# Altium PCB ECE453-BrushedDCMotor.PcbDoc
Units mm, origin at the board's own origin, x right, y up, seen from the top; angles counter-clockwise.
Board outline 100 x 100 mm, 2 copper layers (Top Layer, Bottom Layer); 4 components, 6 nets, 4 pads, 0 vias.
Unrouted connection lines stored in the file: 41.
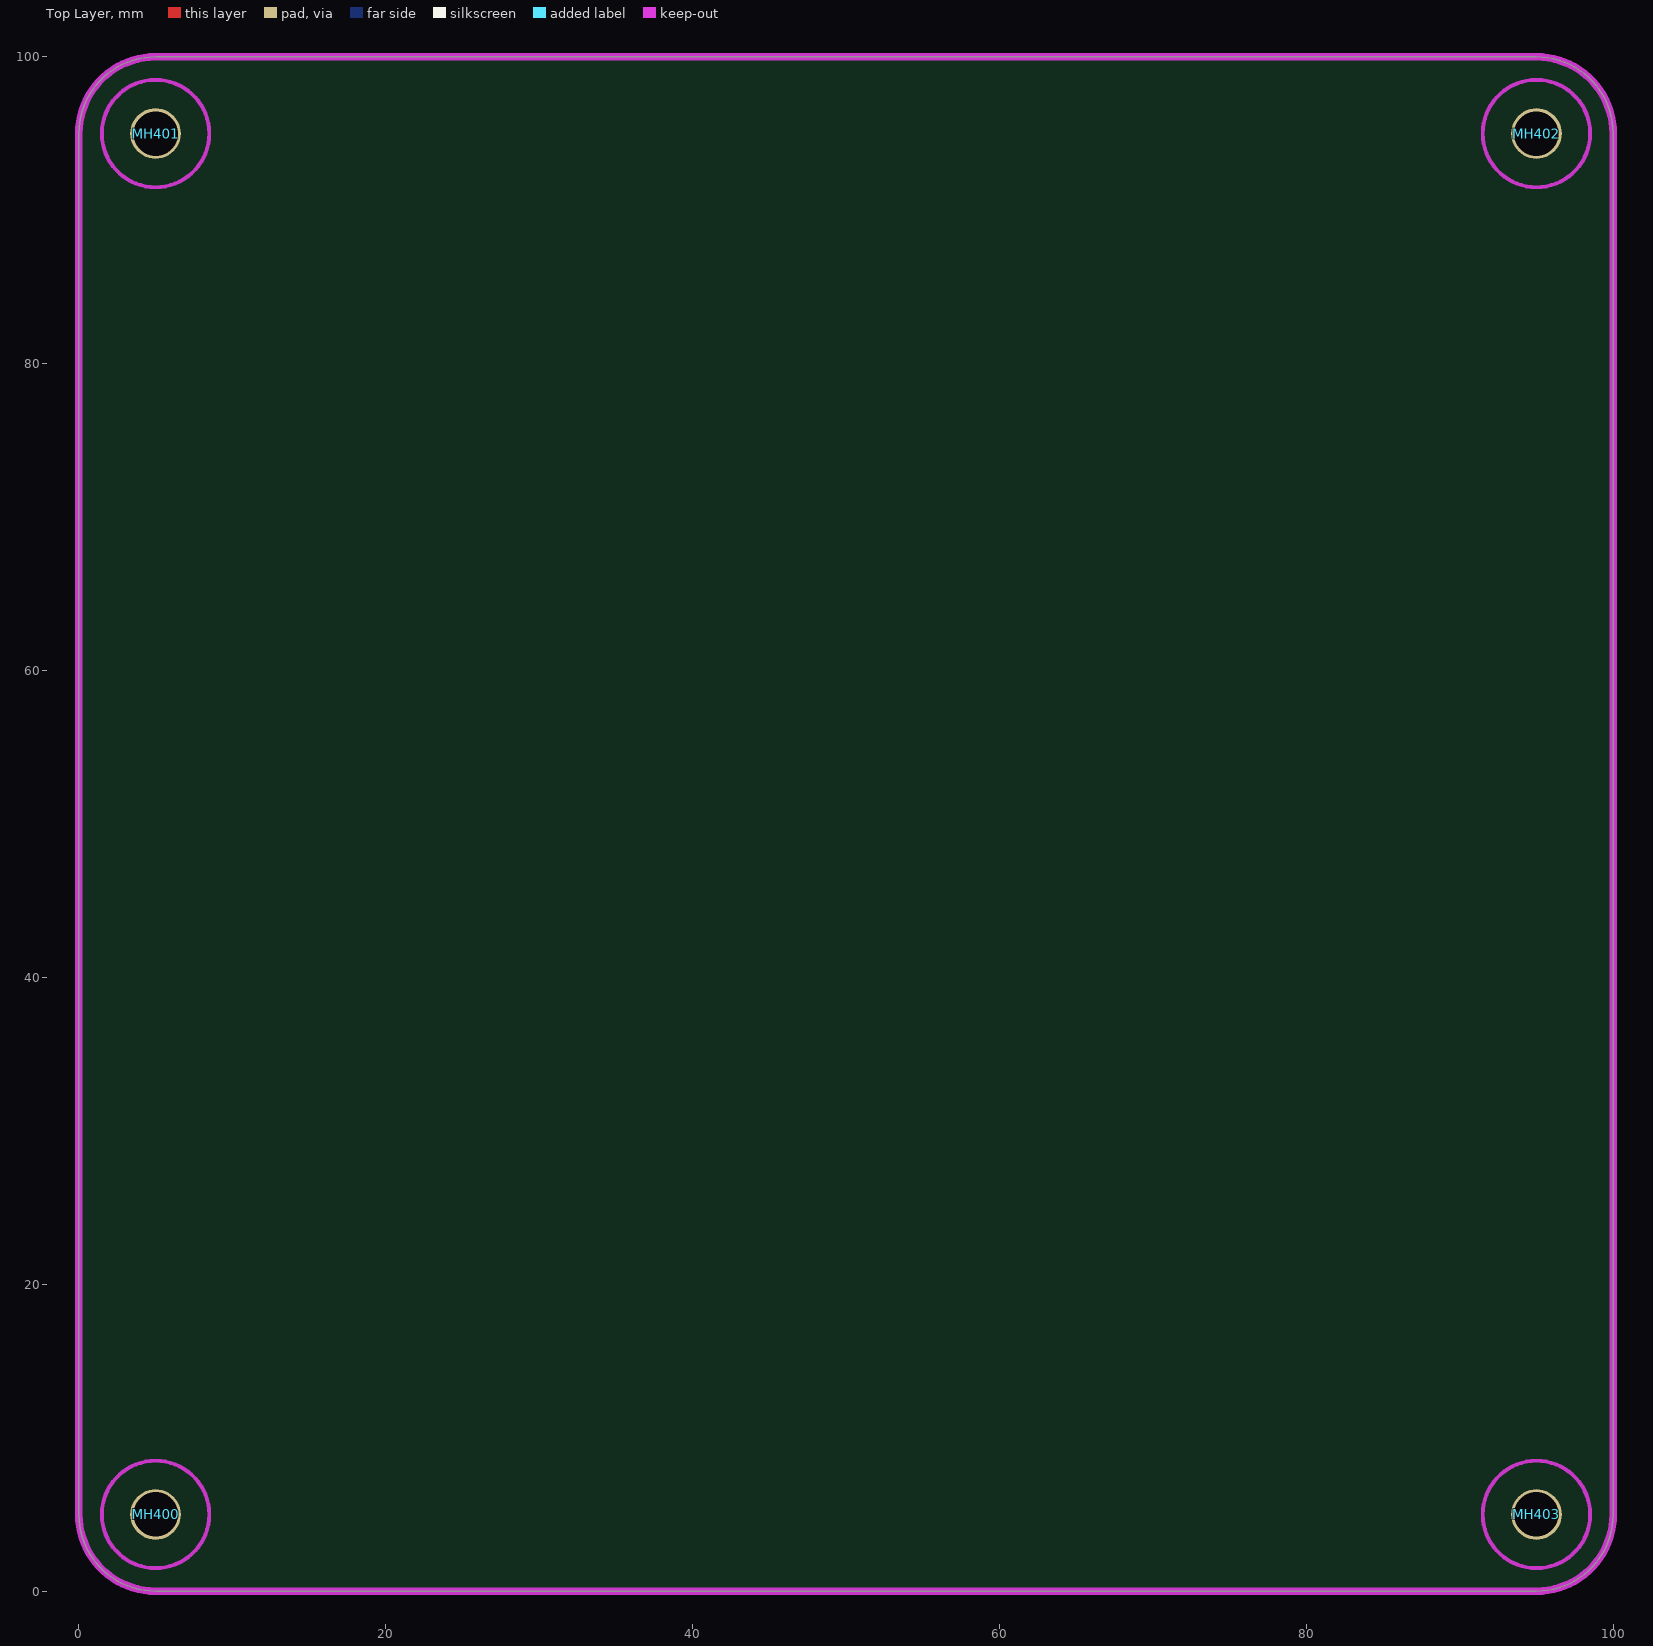
[diagram p0: Top Layer view]
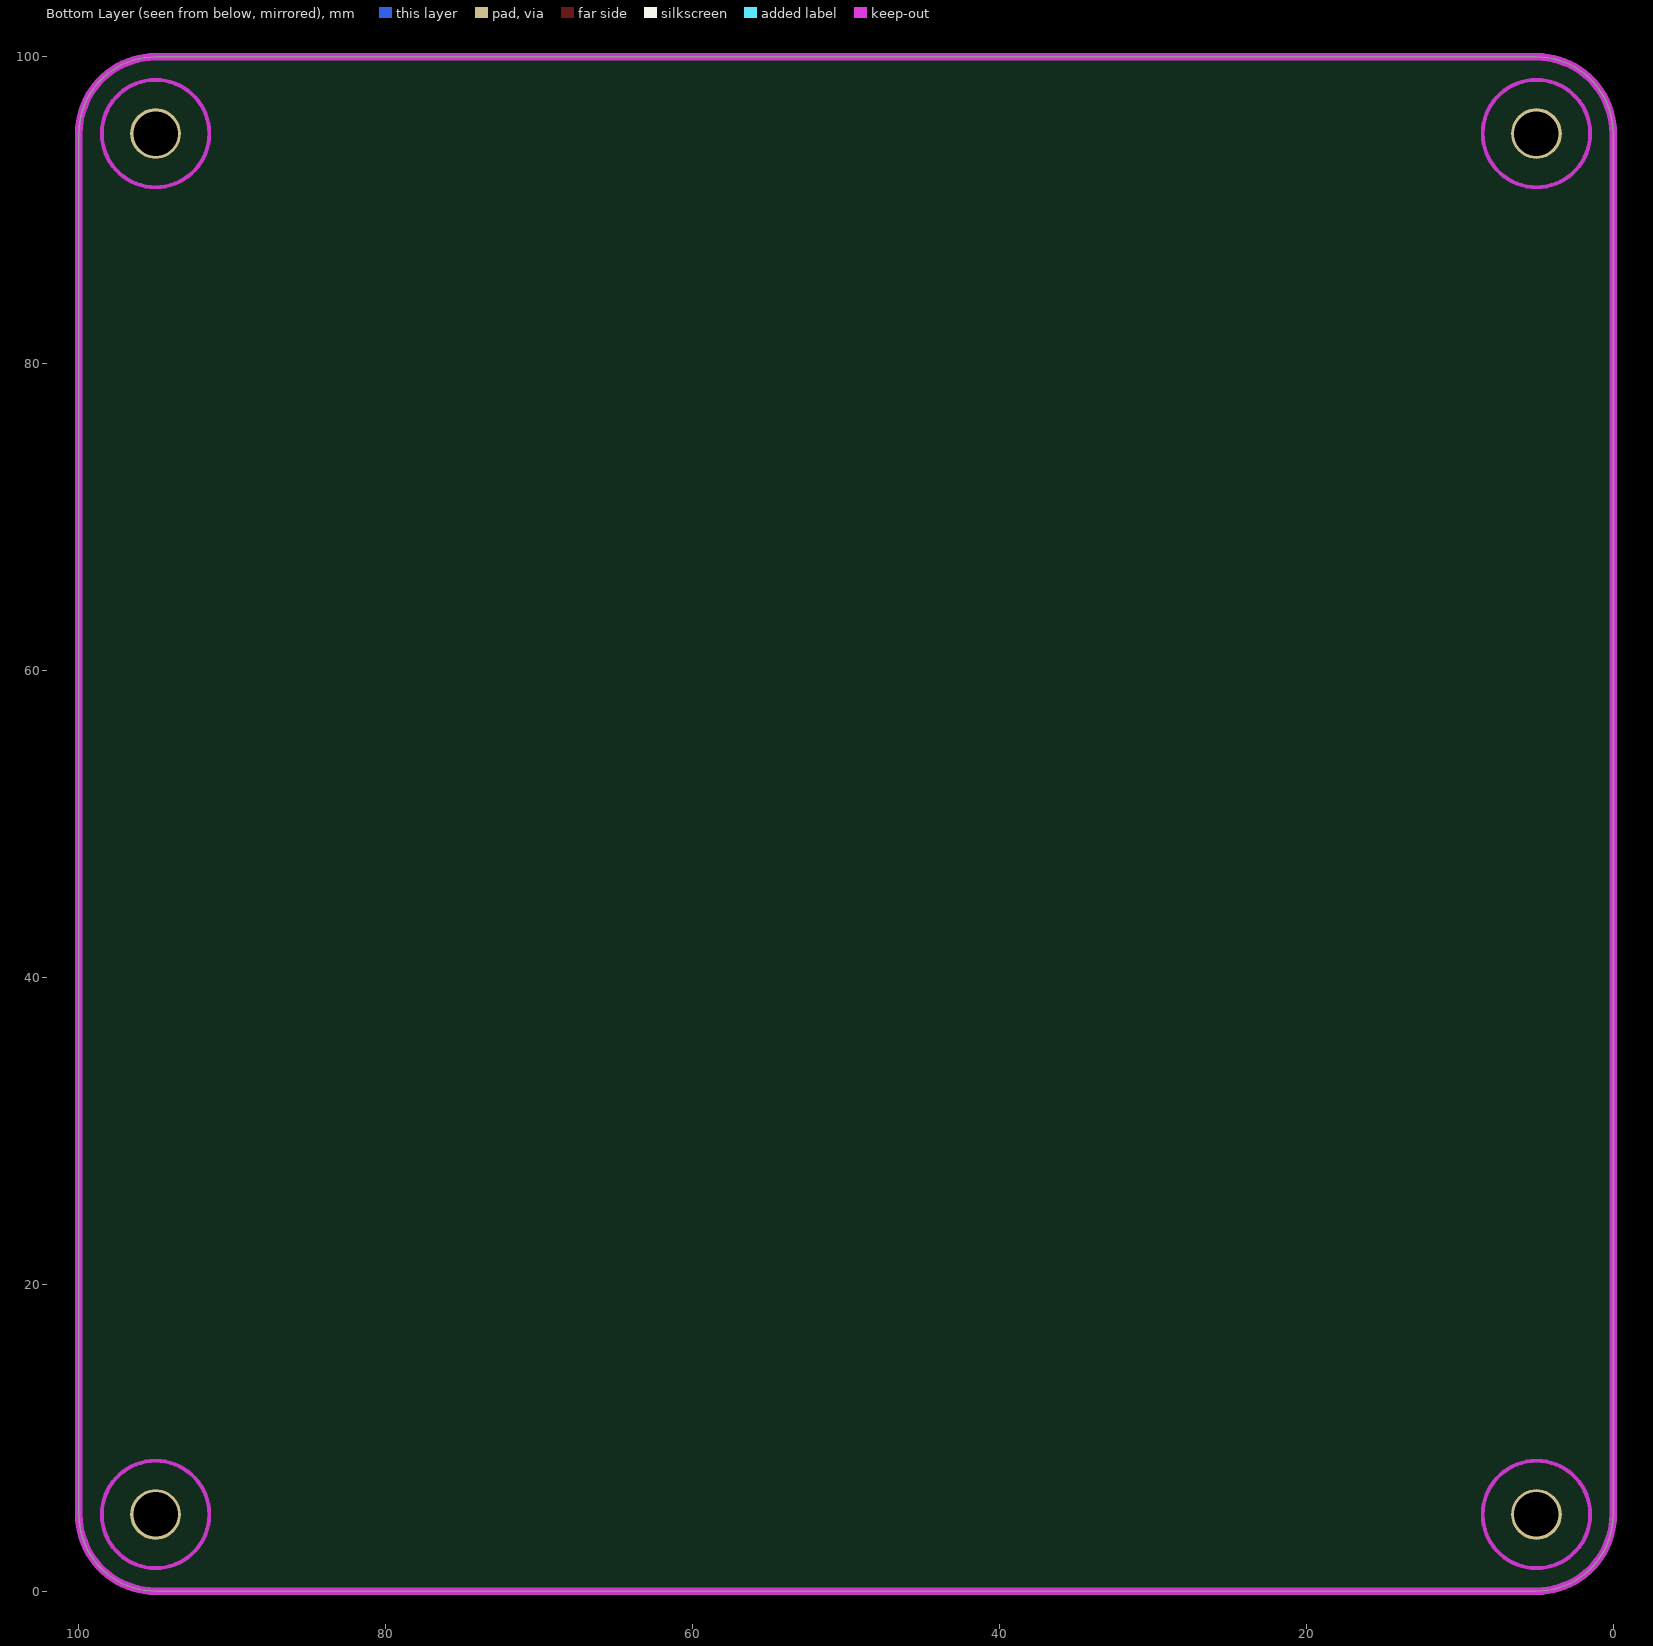
[diagram p1: Bottom Layer view, seen from below]

## Layer stack, top to bottom
Top Solder: solder mask 0.0102, Solder Resist, Dk 3.5
Top Layer: signal copper 0.0356
Dielectric1: dielectric 0.32, FR-4, Dk 4.8
Bottom Layer: signal copper 0.0356
Bottom Solder: solder mask 0.0102, Solder Resist, Dk 3.5

## Board outline
0,5 ccw(c5,5) 5,0 95,0 ccw(c95,5) 100,5 100,95 ccw(c95,95) 95,100 5,100 ccw(c5,95) 0,95

## Design rules (kind name [scope] priority, off if disabled: settings)
Clearance Polygon_Clearance [All vs InPolygon] p1: gap=0.2 ignorepadtopadclearanceinfootprint=FALSE
Clearance [All] p2: gap=0.2 ignorepadtopadclearanceinfootprint=TRUE
ComponentClearance [InComponent('U3')] p1: gap=0 collisioncheckmode=3 verticalgap=0.254 showdistances=FALSE
Height [All] p1: minheight=0 maxheight=75 prefheight=12.7
HoleSize [All] p1: absolutevalues=TRUE maxlimit=6.35 minlimit=0.3 maxpercent=80.000 minpercent=20.000
MinimumAnnularRing [All] p1: minimumring=0.15
MinimumSolderMaskSliver [All] p1: minsoldermaskwidth=0.22
NetAntennae NetAntennae_5.0V [InNet('5.0V')] p1: netantennaetolerance=0
NetAntennae NetAntennae_3.3V [InNet('3.3V')] p2: netantennaetolerance=0
PlaneClearance [All] p1: clearance=0.3
PlaneConnect [All] p1: planeconnectstyle=Relief reliefexpansion=0.3 reliefentries=4 reliefconductorwidth=0.3 reliefairgap=0.3
PolygonConnect ViaConnect [All vs IsVia] p1: connectstyle=Direct reliefconductorwidth=0.381 reliefentries=4 polygonreliefangle="90 Angle" airgapwidth=0.254
PolygonConnect [All] p2: connectstyle=Relief reliefconductorwidth=0.4 reliefentries=4 polygonreliefangle="90 Angle" airgapwidth=0.3
RoutingVias [All] p1: holewidth=0.3 width=0.6 viastyle="Through Hole" minholewidth=0.3 minwidth=0.6 maxholewidth=5 maxwidth=10
SilkToSilkClearance [All] p1: silktosilkclearance=0
SilkToSolderMaskClearance [IsPad] p1: minsilkscreentomaskgap=0 clearancetoexposedcopper=TRUE
SolderMaskExpansion [All] p1: expansion=0.102 istentingtop=FALSE
SupplyNets "Schematic Supply Nets_2" [InNet('3.3V')] p1: voltage=0.000
SupplyNets "Schematic Supply Nets_1" [InNet('GND')] p2: voltage=0.000
SupplyNets "Schematic Supply Nets" [InNet('12V')] p3: voltage=0.000
UnConnectedPin [All] p1:
Width [All] p1: maxlimit=10 minlimit=0.2 preferedwidth=0.6
21 further rules are at their usual default settings.

## Components (designator, comment, footprint, x,y, rotation, side; value= is the part's Value field where it differs from the comment)
MH400 "MHOLE_2_95MM" MHOLE_2_95MM 5,5 r0 top locked
MH401 "MHOLE_2_95MM" MHOLE_2_95MM 5,95 r0 top locked
MH402 "MHOLE_2_95MM" MHOLE_2_95MM 95,95 r0 top locked
MH403 "MHOLE_2_95MM" MHOLE_2_95MM 95,5 r0 top locked

## Footprints (in the part's own frame and the unit in brackets; to place one, negate y for a bottom-side part, rotate by r counter-clockwise, add the part's x,y. Pads: shape width x height; smd on the part's side, far side on the other; paste and mask are expansions set on the pad)
MHOLE_2_95MM [mm]
  round 3.3 hole 2.9 mask-2539.97: 1(0,0)
  Keep-Out Layer circle w0.254: c0,0 r3.5

## Part data
MH400 MH401 MH402 MH403: "Mounting Holde", Manufacturer Part Number="UW MTHOLE"

## Nets (pads, with @x,y where several pads share a name; then routed paths per layer and width w, separated by ;. In a path a pad name is that pad's centre, name@x,y a point inside that pad or via, vN(x,y) a via of type N, cw(c..) or ccw(c..) an arc to the next point about the centre after c; other vN are vias at no path point)
3.3V: 
12V: 
GND: 
PWM1: 
PWM2: 
PWR_ON: 
pads on no net: MH400.1 MH401.1 MH402.1 MH403.1

## Keep-outs
Keep-Out Layer:
  lines w0.254: 5,-0.127 cw(c5,5) -0.127,5 -0.127,94.999 ; -0.127,94.999 cw(c0,95) -0.127,95 ; -0.127,94.999 -0.127,95 ; -0.127,95 cw(c5,95) 5,100.127 ; 0.127,95.001 ccw(c5,95) 0.127,95 ; 0.127,95.001 cw(c5,95) 5,99.873 ; 0.127,95 ccw(c0,95) 0.127,95.001 ; 0.127,95 0.127,5 ccw(c5,5) 5,0.127 ; 5,-0.127 95,-0.127 ccw(c95,5) 100.127,4.999 ; 5,-0.127 5,-0.127 ; 5,0.127 95,0.127 ccw(c95,5) 99.873,5 ; 5,0.127 5,0.127 ; 5,99.873 94.999,99.873 ; 5,99.873 5,99.873 ; 5,100.127 95,100.127 ; 5,100.127 5,100.127 ; 94.999,99.873 ccw(c95,100) 95,99.873 ; 95,99.873 cw(c95,95) 99.873,95 ; 94.999,99.873 95,99.873 ; 95,100.127 cw(c95,95) 95.001,100.127 ; 95,100.127 cw(c95,100) 95.001,100.127 ; 95.001,100.127 cw(c95,95) 100.127,95.001 ; 99.873,5.001 ccw(c100,5) 99.873,5 ; 99.873,5.001 99.873,94.999 ; 99.873,5 99.873,5.001 ; 99.873,94.999 cw(c100,95) 99.873,95 ; 99.873,94.999 99.873,95 ; 100.127,4.999 ccw(c100,5) 100.127,5 ; 100.127,4.999 ccw(c95,5) 100.127,5 ; 100.127,5 ccw(c100,5) 100.127,5 ; 100.127,5 100.127,95 ; 100.127,95 ccw(c100,95) 100.127,95.001 ; 100.127,95 ccw(c95,95) 100.127,95.001

## Silkscreen, mask and mechanical layers (free items; w line width, h text height)
Mechanical 2:
  lines w0.254: 5,0 cw(c5,5) 0,5 0,95 cw(c5,95) 5,100 95,100 cw(c95,95) 100,95 100,5 cw(c95,5) 95,0 5,0 ; 5,0 5,0

## Dimensions
0,5 to 100,5 on Mechanical 1